# Altium PCB Bootloader.PcbDoc
Units mm, origin at the board's own origin, x right, y up, seen from the top; angles counter-clockwise.
Board outline 50 x 50 mm, 2 copper layers (Top Layer, Bottom Layer); 6 components, 8 nets, 42 pads, 0 vias.
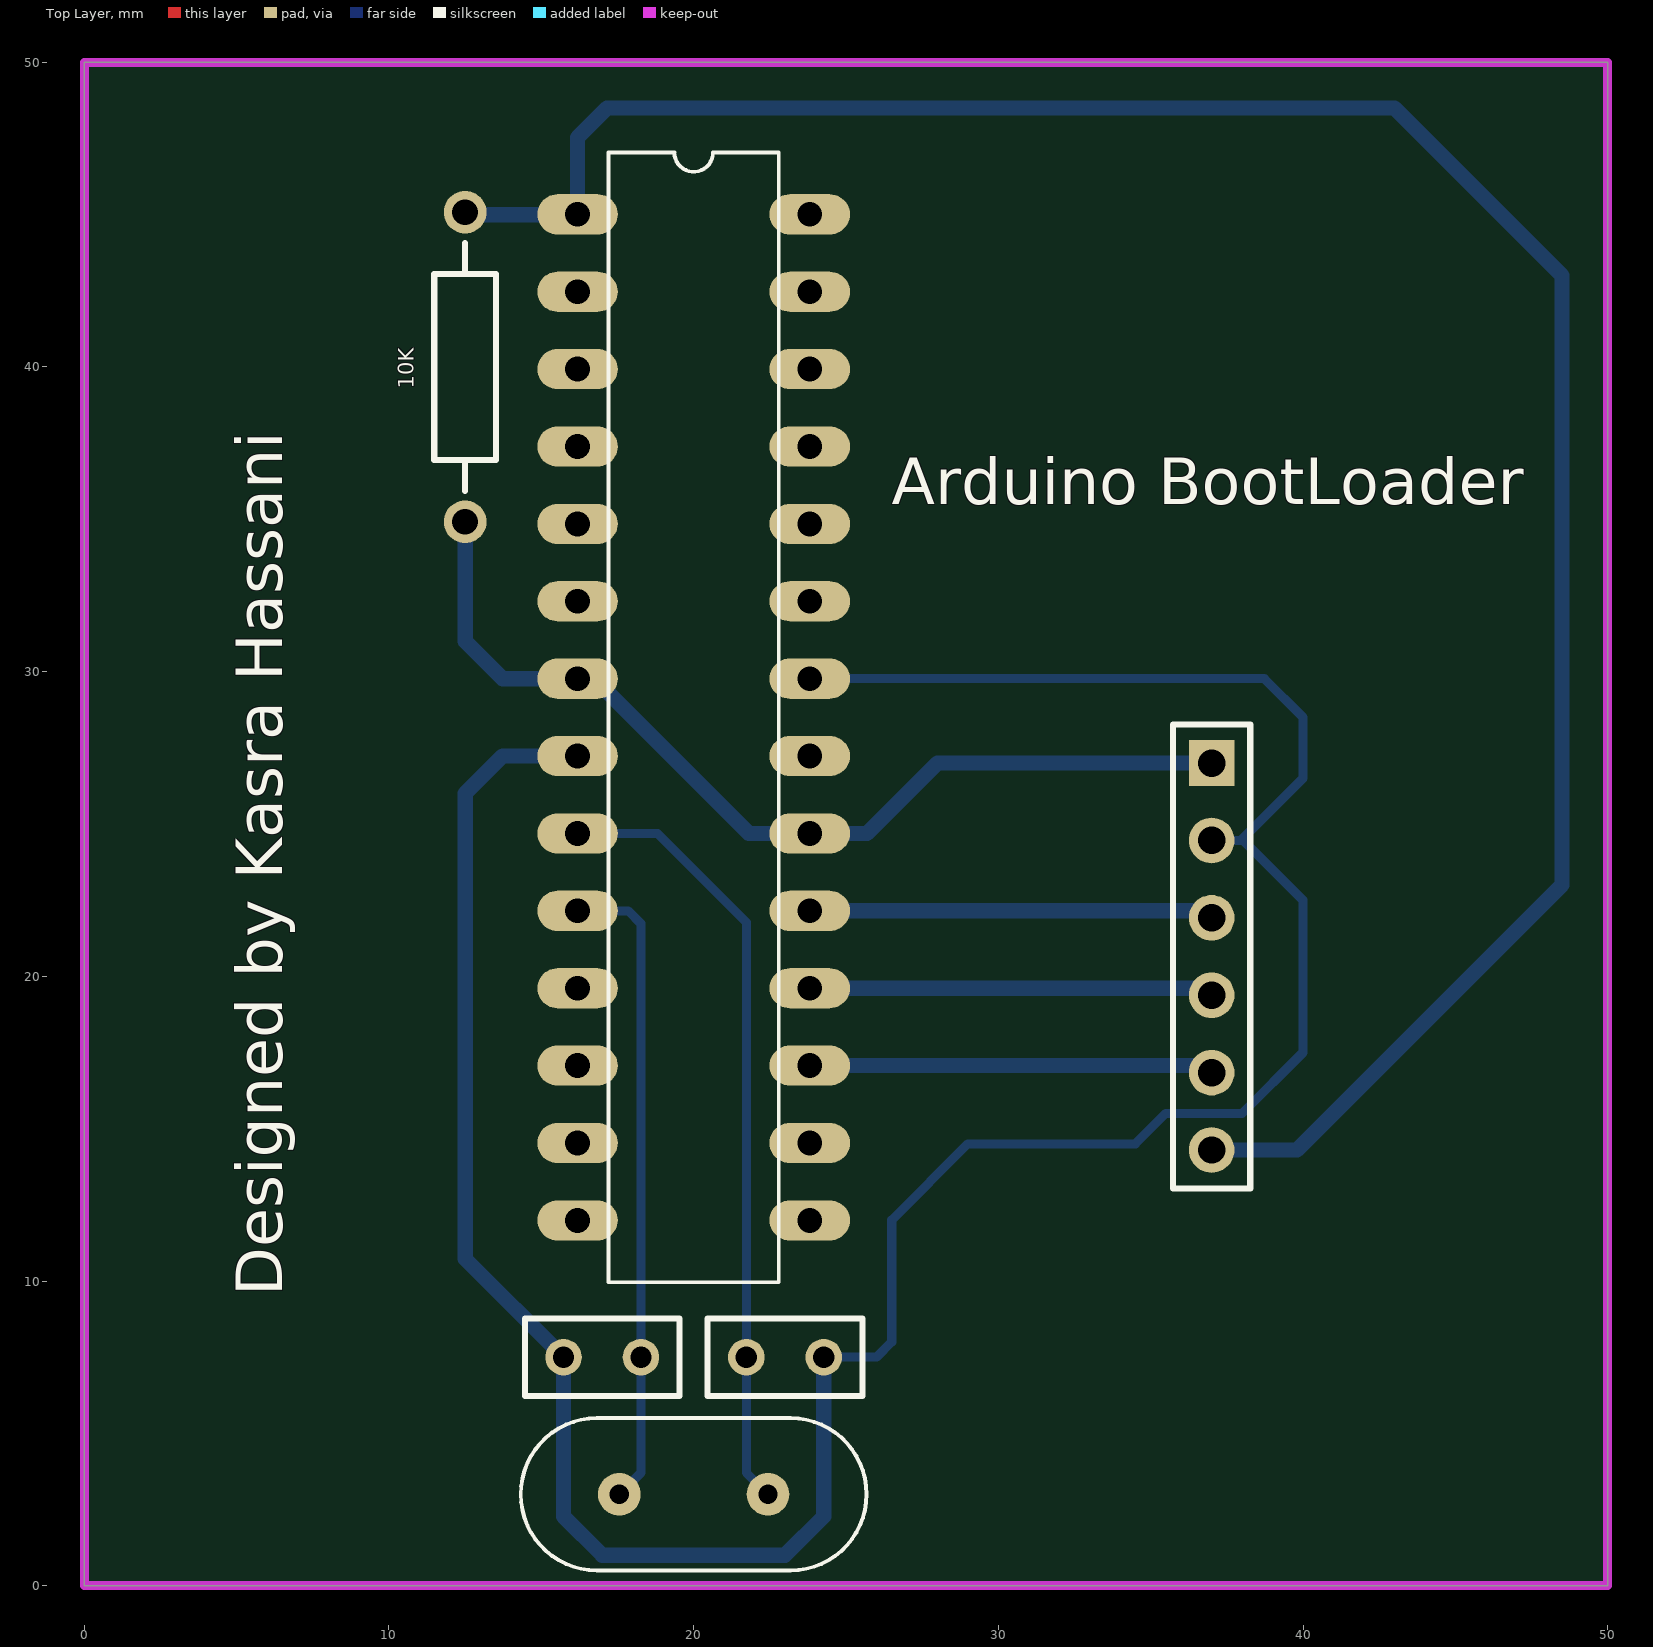
[diagram p0: Top Layer view]
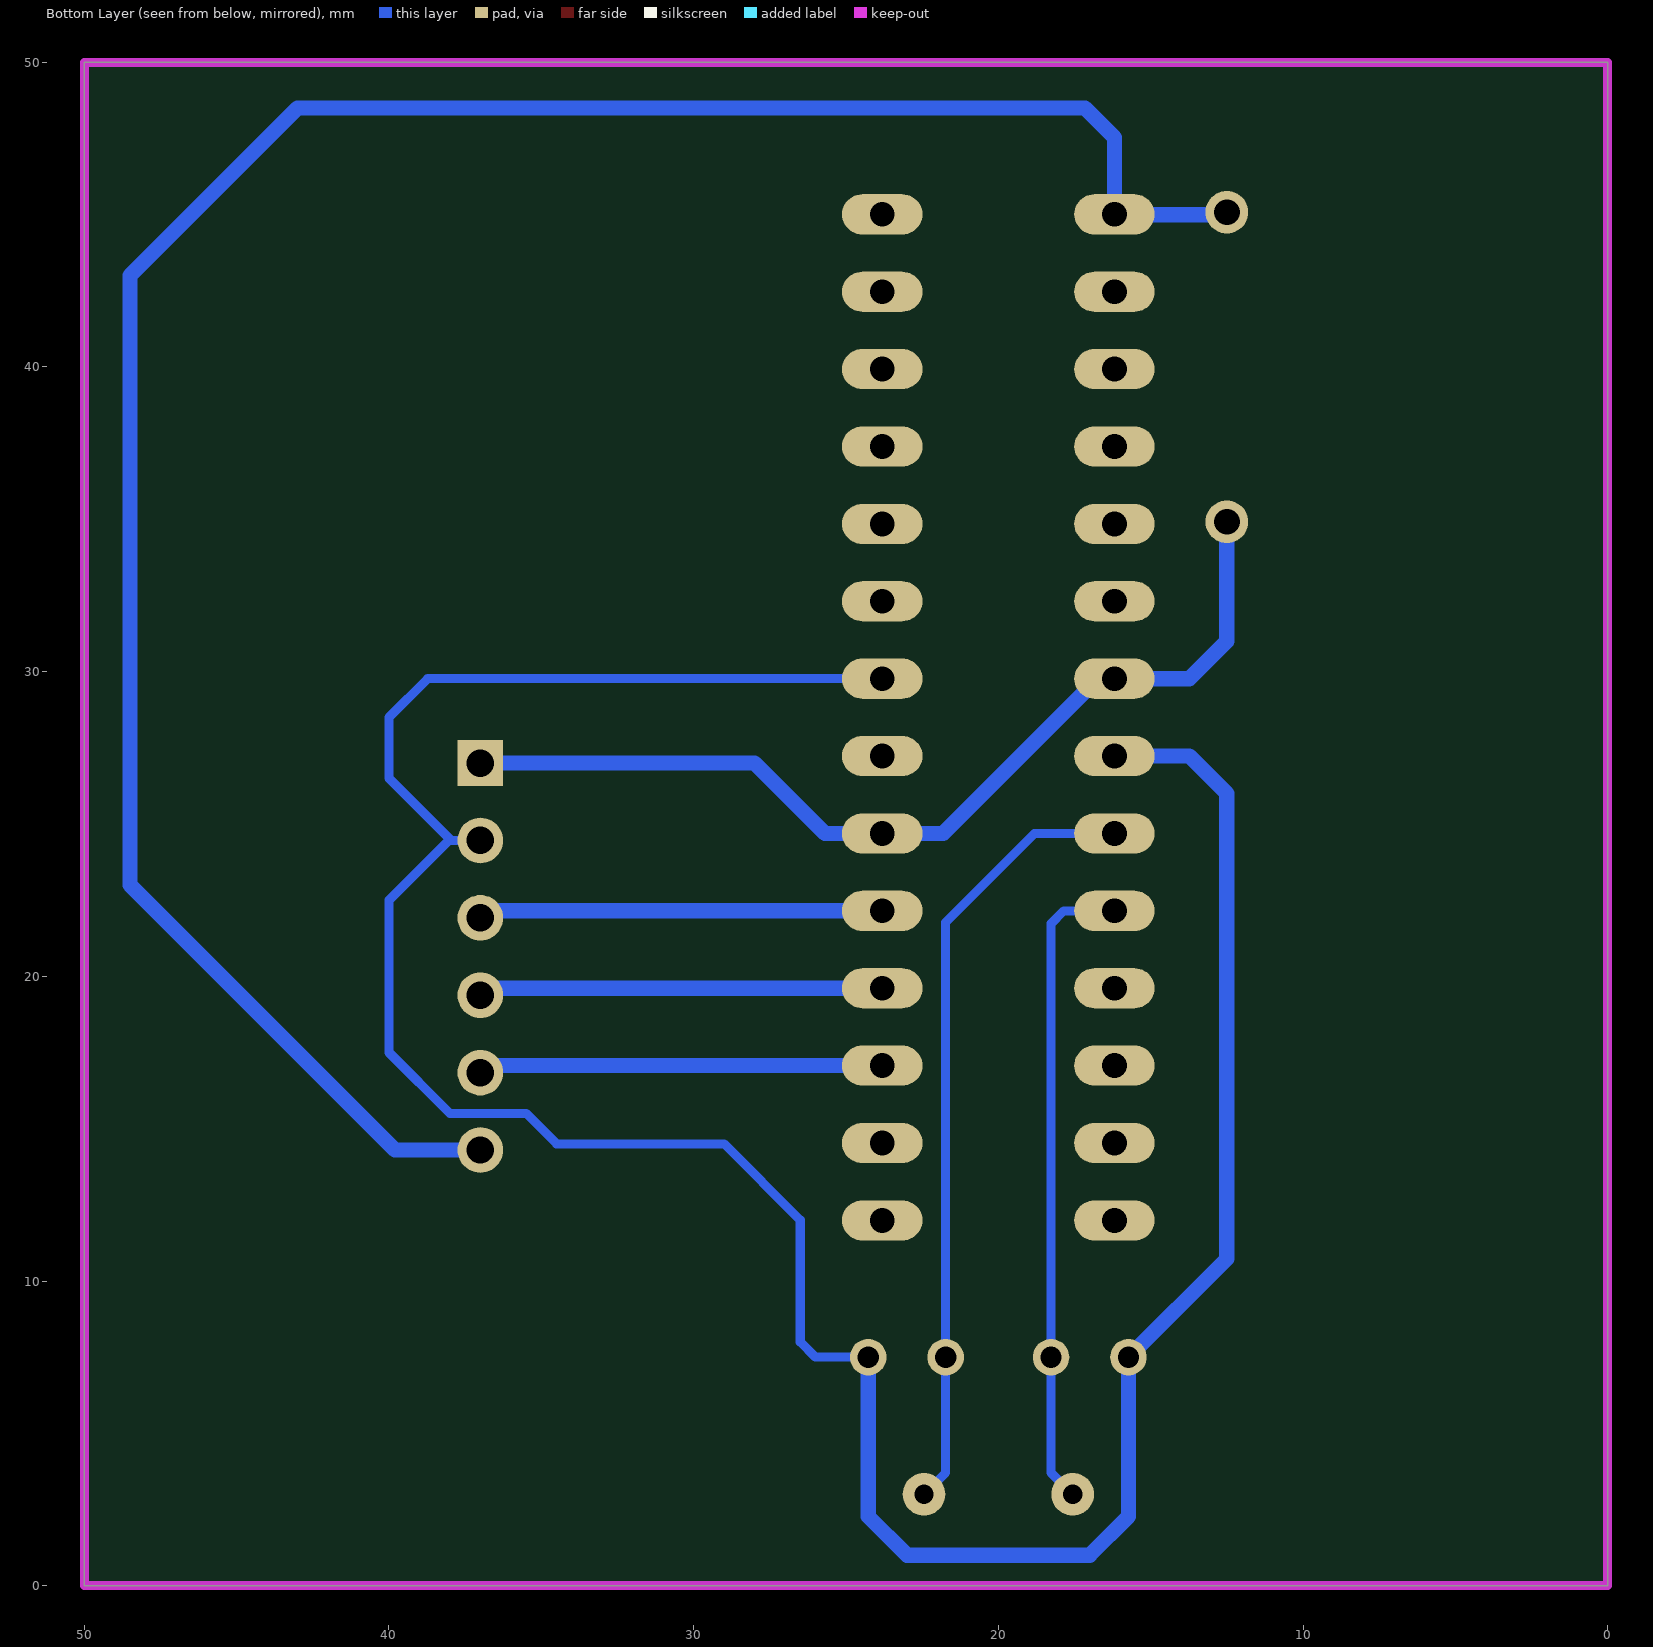
[diagram p1: Bottom Layer view, seen from below]

## Layer stack, top to bottom
Top Solder: solder mask 0.0102, Solder Resist, Dk 3.5
Top Layer: signal copper 0.0356
Dielectric 1: dielectric 0.32, FR-4, Dk 4.8
Bottom Layer: signal copper 0.0356
Bottom Solder: solder mask 0.0102, Solder Resist, Dk 3.5

## Board outline
0,0 50,0 50,50 0,50

## Design rules (kind name [scope] priority, off if disabled: settings)
Clearance [All] p1: gap=0.254
PolygonConnect [All] p1: connectstyle=Relief reliefconductorwidth=0.254 reliefentries=4 polygonreliefangle="90 Angle" airgapwidth=0.254
RoutingVias [All] p1: holewidth=0.711 width=1.27 viastyle="Through Hole" minholewidth=0.711 minwidth=1.27 maxholewidth=0.711 maxwidth=1.27
SolderMaskExpansion [All] p1: expansion=0.102
Width [All] p1: maxlimit=0.5 minlimit=0.254 preferedwidth=0.3 toplayer_maxwidth=0.254 toplayer_prefwidth=0.254 bottomlayer_minwidth=0.3 minimp=50.000000 maximp=50.000000 favimp=50.000000
30 further rules are at their usual default settings.

## Components (designator, comment, footprint, x,y, rotation, side; value= is the part's Value field where it differs from the comment)
10K "Comment" AXIAL-0.4 12.5,40 r90 top
? "Comment" DIL28 20,28.5 r0 top
? "Comment" RAD-0.1 23,7.5 r180 top
? "Comment" RAD-0.1 17,7.5 r180 top
? "Comment" XTAL_ECS-160-20-4VX 20,3 r0 top
? "Comment" HDR1X6 37,27 r270 top

## Footprints (in the part's own frame and the unit in brackets; to place one, negate y for a bottom-side part, rotate by r counter-clockwise, add the part's x,y. Pads: shape width x height; smd on the part's side, far side on the other; paste and mask are expansions set on the pad)
AXIAL-0.4 [mm] "Axial Device, Thru-Hole; 2 Leads; 0.4 in Pin Spacing"
  round 1.4 hole 0.85: 1(-5.08,0) 2(5.08,0)
  silkscreen extent -4.06,-1.02 4.06,1.02
DIL28 [mil]
  oval 104x52 hole 32: 1(-150,650) 2(-150,550) 3(-150,450) 4(-150,350) 5(-150,250) 6(-150,150) 7(-150,50) 8(-150,-50) 9(-150,-150) 10(-150,-250) 11(-150,-350) 12(-150,-450) 13(-150,-550) 14(-150,-650) 15(150,-650) 16(150,-550) 17(150,-450) 18(150,-350) 19(150,-250) 20(150,-150) 21(150,-50) 22(150,50) 23(150,150) 24(150,250) 25(150,350) 26(150,450) 27(150,550) 28(150,650)
  silkscreen extent -110,-730 110,730
HDR1X6 [mm] "Connector; Header; 6 Position"
  rect 1.5x1.5 hole 0.9: 1(0,0)
  round 1.5 hole 0.9: 2(2.54,0) 3(5.08,0) 4(7.62,0) 5(10.16,0) 6(12.7,0)
  silkscreen extent -1.27,-1.27 13.97,1.27
RAD-0.1 [mm] "Radial Cap, Thru-Hole; 2 Leads; 0.1 in Pin Spacing"
  round 1.2 hole 0.7: 1(-1.27,0) 2(1.27,0)
  silkscreen extent -2.54,-1.27 2.54,1.27
XTAL_ECS-160-20-4VX [mm]
  round 1.4 hole 0.63: 1(-2.44,0) 2(2.44,0)
  silkscreen extent -5.68,-2.5 5.68,2.5

## Part data
10K: library part Res2
?: library part ATMEGA328-PU
?: library part ECS-160-20-4VX
?: library part "Header 6"

## Nets (pads, with @x,y where several pads share a name; then routed paths per layer and width w, separated by ;. In a path a pad name is that pad's centre, name@x,y a point inside that pad or via, vN(x,y) a via of type N, cw(c..) or ccw(c..) an arc to the next point about the centre after c; other vN are vias at no path point)
10: 10K.2 ?.1@16.19,45.01 ?.6@37,14.3 | length 76.3
  Bottom Layer w0.5: 10K.2@12.5,45 ?.1@16.18,45 ; ?.1@16.19,45.01 16.19,47.536 17.154,48.5 43,48.5 48.5,43 48.5,23 39.8,14.3 ?.6@37,14.3
11: ?.5@37,16.84 ?.17 | length 13.5
  Bottom Layer w0.5: ?.17 ?.5@37,17.07 ; ?.5@36.77,17.07 ?.5@37,16.84
12: ?.4@37,19.38 ?.18 | length 13.5
  Bottom Layer w0.5: ?.18 ?.4@37,19.61 ; ?.4@36.77,19.61 ?.4@37,19.38
13: ?.3@37,21.92 ?.19 | length 13.5
  Bottom Layer w0.5: ?.19 ?.3@37,22.15 ; ?.3@36.77,22.15 ?.3@37,21.92
GND: ?.1@24.27,7.5 ?.2@15.73,7.5 ?.2@37,24.46 ?.8 ?.22 | length 96.7
  Bottom Layer w0.3: ?.22 38.73,29.77 40,28.5 40,26.5 38.04,24.54 38.04,24.46 ; ?.1@24.27,7.5 26,7.5 26.5,8 26.5,12 29,14.5 34.5,14.5 35.5,15.5 38,15.5 40,17.5 40,22.5 38.04,24.46 ; ?.2@37,24.46 38.04,24.46
  Bottom Layer w0.5: ?.8 13.73,27.23 12.5,26 12.5,10.73 15.73,7.5 15.73,2.27 17,1 23,1 24.27,2.27 ?.1@24.27,7.5
VCC: 10K.1 ?.1@37,27 ?.7 ?.20 | length 32
  Bottom Layer w0.5: 10K.1 12.5,31 13.73,29.77 ?.7 16.73,29.77 21.81,24.69 ?.20 25.69,24.69 28,27 ?.1@37,27
XTAL1: ?.2@21.73,7.5 ?.2@22.44,3 ?.9 | length 25.8
  Bottom Layer w0.3: ?.9 18.81,24.69 21.73,21.77 21.73,7.5 21.73,3.71 ?.2@22.44,3
XTAL2: ?.1@17.56,3 ?.1@18.27,7.5 ?.10 | length 21.3
  Bottom Layer w0.3: ?.10 17.85,22.15 18.27,21.73 18.27,7.5 18.27,3.71 ?.1@17.56,3
pads on no net: ?.2@16.19,42.47 ?.3@16.19,39.93 ?.4@16.19,37.39 ?.5@16.19,34.85 ?.6@16.19,32.31 ?.11 ?.12 ?.13 ?.14 ?.15 ?.16 ?.21 ?.23 ?.24 ?.25 ?.26 ?.27 ?.28

## Keep-outs
Keep-Out Layer:
  the board outline again, w0.3

## Silkscreen, mask and mechanical layers (free items; w line width, h text height)
Top Overlay:
  text "Arduino BootLoader" at 26.5,35.5 h1.52
  text "Designed by Kasra Hassani" at 6.5,9.5 h1.52 r90